# EAGLE board gatedriver_trafo_sma_compact_ACDC_ultra (EAGLE 7.2.0)
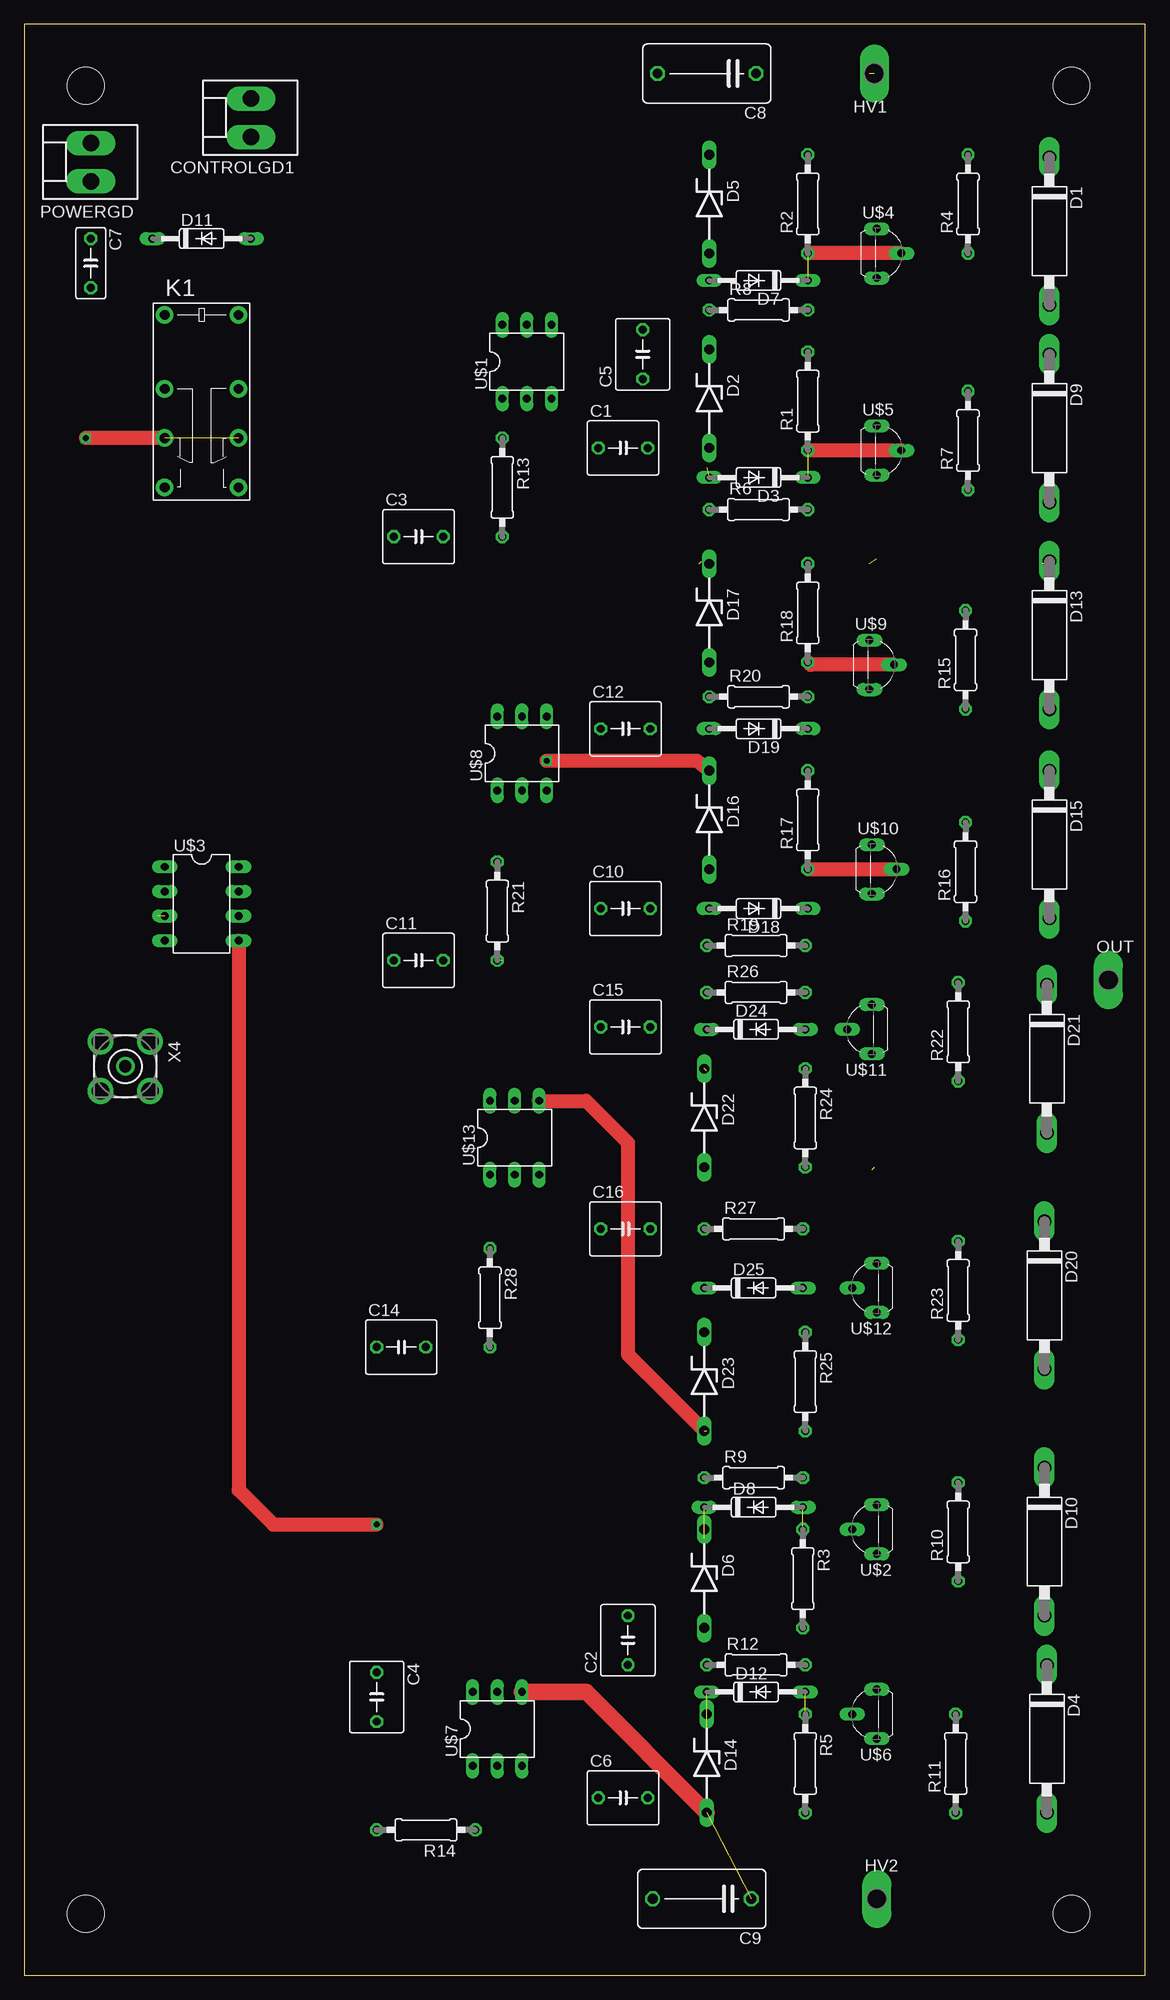
[diagram p0: board, top side]
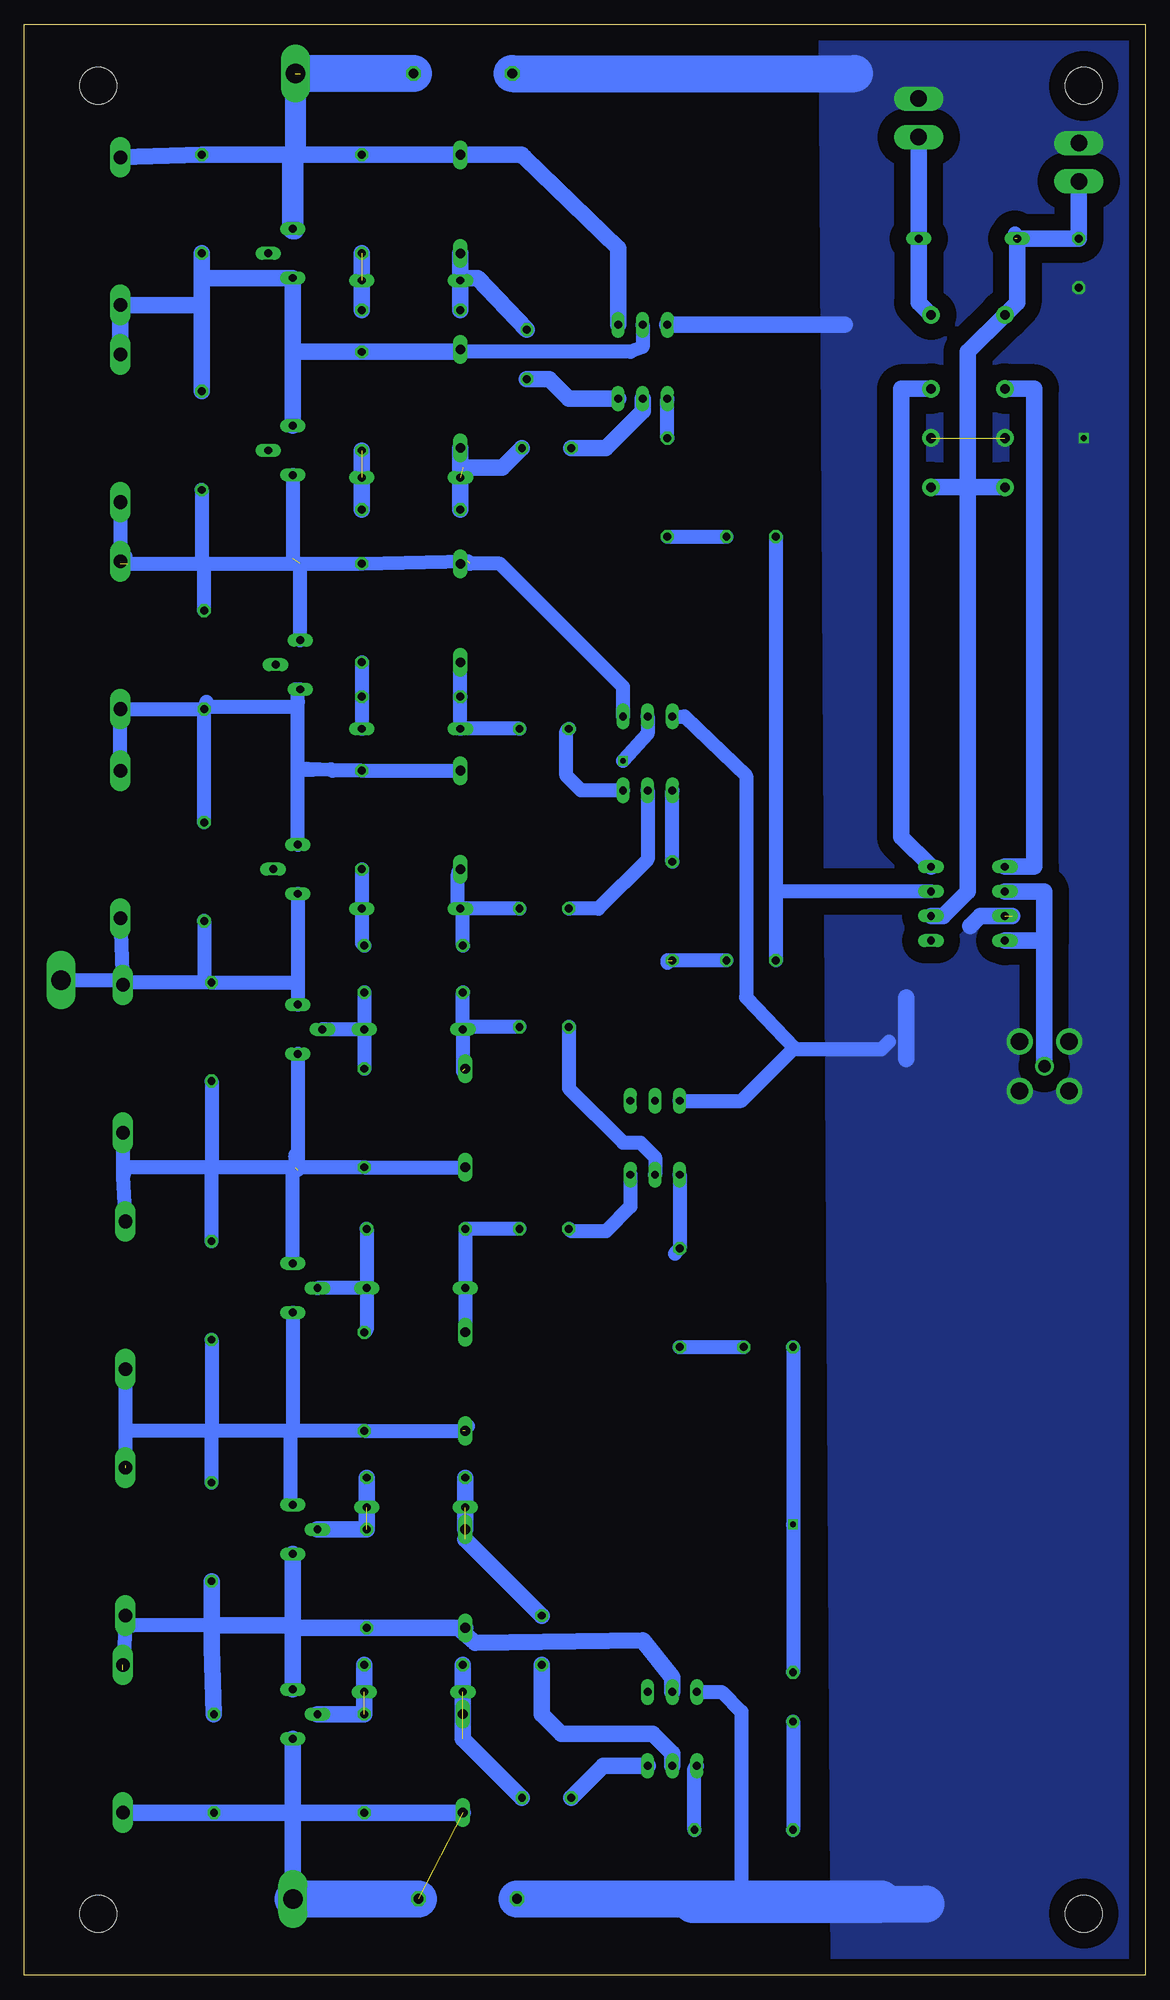
[diagram p1: board, bottom side, seen from below]

Size 115.57 x 201.17 mm. Coordinates in mm from the lower left corner, seen from the top.
Outline: 0,0 115.57,0 115.57,201.17 0,201.17 0,0
Copper layers (1*16): Top 0.035mm / dielectric 1.5mm / Bottom 0.035mm
Design rules "default": minimum track width 10mil, minimum drill 24mil, track to track 8mil, track to pad 8mil, pad to pad 8mil, via to via 8mil, smd to smd 8mil, copper to edge 40mil, drill to drill 8mil, minimum pad ring 10mil, minimum via ring 8mil, stop-mask expansion 4mil, vias tented up to drill 0mil, thermal gap 10mil
Holes 3.8 mm at 107.95,194.82 107.95,6.35 6.35,6.35 6.35,194.82

## Footprints (pad centres in the part's own frame; a part is rotated, then mirrored left to right if it is on the bottom)
C050-055X075 = drill 0.813 octagon: 1 -2.54,0; 2 2.54,0
C050-030X075 = drill 0.813 octagon: 1 -2.54,0; 2 2.54,0
C102-064X133 = drill 1.016 octagon: 1 -5.08,0; 2 5.08,0
KK-156-2 = drill 1.7 pad 2.184 long: 1 -1.98,0; 2 1.98,0
C1702-15 = drill 1.397 long: A 7.62,0; C -7.62,0
ZDIO-10 = drill 1 long: A 5.08,0; C -5.08,0
DO35-10 = drill 0.813 long: A 5.08,0; C -5.08,0
P1-20Y = drill 2.007 pad 2.54 long: TP 0,0
G5V-2 = drill 1 pad 1.8: 1 -8.89,-3.81; 4 -1.27,-3.81; 6 3.81,-3.81; 8 8.89,-3.81; 9 8.89,3.81; 11 3.81,3.81; 13 -1.27,3.81; 16 -8.89,3.81
0207/10 = drill 0.813 octagon: 1 -5.08,0; 2 5.08,0
DIL06 = drill 0.813 long: 1 -2.54,-3.81; 2 0,-3.81; 3 2.54,-3.81; 4 2.54,3.81; 5 0,3.81; 6 -2.54,3.81
TO92L = drill 0.813 long: 1 0,-2.54; 2 2.54,0; 3 0,2.54
DIL08 = drill 0.813 long: 1 -3.81,-3.81; 2 -1.27,-3.81; 3 1.27,-3.81; 4 3.81,-3.81; 5 3.81,3.81; 6 1.27,3.81; 7 -1.27,3.81; 8 -3.81,3.81
BU-SMA-V = drill 1.27: 1 0,0 | drill 1.778: 2 -2.55,2.55; 3 2.55,2.55; 4 2.55,-2.55; 5 -2.55,-2.55

## Placement (x,y rotation side)
C1  .22u  [C050-055X075]  61.72,157.48 0 top
C2  .22u  [C050-055X075]  62.23,34.54 90 top
C3  .22u  [C050-055X075]  40.64,148.34 0 top
C4  .22u  [C050-055X075]  36.32,28.7 270 top
C5  .22u  [C050-055X075]  63.75,167.13 90 top
C6  .22u  [C050-055X075]  61.72,18.29 0 top
C7  [C050-030X075]  6.86,176.53 270 top
C8  10p  [C102-064X133]  70.36,196.09 180 top
C9  10p  [C102-064X133]  69.85,7.87 180 top
C10  .22u  [C050-055X075]  61.98,109.98 0 top
C11  .22u  [C050-055X075]  40.64,104.65 0 top
C12  .22u  [C050-055X075]  61.98,128.52 0 top
C14  .22u  [C050-055X075]  38.86,64.77 0 top
C15  .22u  [C050-055X075]  61.98,97.79 0 top
C16  .22u  [C050-055X075]  61.98,76.96 0 top
CONTROLGD1  [KK-156-2]  23.37,191.52 90 top
D1  P6KEXXA  [C1702-15]  105.66,179.83 270 top
D2  4742  [ZDIO-10]  70.61,162.56 270 top
D3  1N4148DO35-10  [DO35-10]  75.69,154.43 180 top
D4  P6KEXXA  [C1702-15]  105.41,24.38 270 top
D5  4742  [ZDIO-10]  70.61,182.63 270 top
D6  4742  [ZDIO-10]  70.1,40.89 270 top
D7  1N4148DO35-10  [DO35-10]  75.69,174.75 180 top
D8  1N4148DO35-10  [DO35-10]  75.18,48.26 0 top
D9  P6KEXXA  [C1702-15]  105.66,159.51 270 top
D10  P6KEXXA  [C1702-15]  105.16,44.7 270 top
D11  1N4148DO35-10  [DO35-10]  18.29,179.07 0 top
D12  1N4148DO35-10  [DO35-10]  75.44,29.21 0 top
D13  P6KEXXA  [C1702-15]  105.66,138.18 270 top
D14  4742  [ZDIO-10]  70.36,21.84 270 top
D15  P6KEXXA  [C1702-15]  105.66,116.59 270 top
D16  4742  [ZDIO-10]  70.61,119.13 270 top
D17  4742  [ZDIO-10]  70.61,140.46 270 top
D18  1N4148DO35-10  [DO35-10]  75.69,109.98 180 top
D19  1N4148DO35-10  [DO35-10]  75.69,128.52 180 top
D20  P6KEXXA  [C1702-15]  105.16,70.1 270 top
D21  P6KEXXA  [C1702-15]  105.41,94.49 270 top
D22  4742  [ZDIO-10]  70.1,88.39 270 top
D23  4742  [ZDIO-10]  70.1,61.21 270 top
D24  1N4148DO35-10  [DO35-10]  75.44,97.54 0 top
D25  1N4148DO35-10  [DO35-10]  75.18,70.87 0 top
HV1  TPPAD1-20Y  [P1-20Y]  87.63,196.09 180 top
HV2  TPPAD1-20Y  [P1-20Y]  87.88,7.87 0 top
K1  G5V-2  [G5V-2]  18.29,162.31 270 top
OUT  TPPAD1-20Y  [P1-20Y]  111.76,102.62 0 top
POWERGD  [KK-156-2]  6.86,186.94 90 top
R1  50k  [0207/10]  80.77,162.31 90 top
R2  50k  [0207/10]  80.77,182.63 90 top
R3  50k  [0207/10]  80.26,40.89 270 top
R4  1M  [0207/10]  97.28,182.63 90 top
R5  50k  [0207/10]  80.52,21.84 270 top
R6  70  [0207/10]  75.69,151.13 0 top
R7  1M  [0207/10]  97.28,158.24 90 top
R8  70  [0207/10]  75.69,171.7 0 top
R9  70  [0207/10]  75.18,51.31 0 top
R10  1M  [0207/10]  96.27,45.72 90 top
R11  1M  [0207/10]  96.01,21.84 90 top
R12  70  [0207/10]  75.44,32 0 top
R13  70  [0207/10]  49.28,153.42 270 top
R14  70  [0207/10]  41.4,14.99 180 top
R15  1M  [0207/10]  97.03,135.64 90 top
R16  1M  [0207/10]  97.03,113.79 90 top
R17  50k  [0207/10]  80.77,119.13 90 top
R18  50k  [0207/10]  80.77,140.46 90 top
R19  70  [0207/10]  75.44,106.17 0 top
R20  70  [0207/10]  75.69,131.83 0 top
R21  70  [0207/10]  48.77,109.73 270 top
R22  1M  [0207/10]  96.27,97.28 90 top
R23  1M  [0207/10]  96.27,70.61 90 top
R24  50k  [0207/10]  80.52,88.39 270 top
R25  50k  [0207/10]  80.52,61.21 270 top
R26  70  [0207/10]  75.44,101.35 0 top
R27  70  [0207/10]  75.18,76.96 0 top
R28  70  [0207/10]  48.01,69.85 270 top
U$1  DA-2320  [DIL06]  51.82,166.37 0 top
U$2  VN0550L  [TO92L]  87.88,45.97 180 top
U$3  UCC27425  [DIL08]  18.29,110.49 270 top
U$4  VP0550L  [TO92L]  87.88,177.55 0 top
U$5  VP0550L  [TO92L]  87.88,157.23 0 top
U$6  VN0550L  [TO92L]  87.88,26.92 180 top
U$7  DA-2320  [DIL06]  48.77,25.4 0 top
U$8  DA-2320  [DIL06]  51.31,125.98 0 top
U$9  VP0550L  [TO92L]  87.12,135.13 0 top
U$10  VP0550L  [TO92L]  87.38,114.05 0 top
U$11  VN0550L  [TO92L]  87.38,97.54 180 top
U$12  VN0550L  [TO92L]  87.88,70.87 180 top
U$13  DA-2320  [DIL06]  50.55,86.36 0 top
X4  BU-SMA-V  [BU-SMA-V]  10.41,93.73 270 top

## Library data of the parts
C1-C6 C8-C12 C14-C16 = resistor
C7 R1-R28 = rcl
CONTROLGD1 POWERGD = con-molex; OC_FARNELL: unknown; OC_NEWARK: unknown
D1-D25 = diode
HV1 HV2 OUT = testpad
K1 = relay; MPN: G5V-2 5DC; OC_FARNELL: 9949488; OC_NEWARK: 78K5703
U$1 U$7 U$8 U$13 = trafo
U$2 U$4-U$6 U$9-U$12 = transistor-fet
U$3 = texas
X4 = con-coax; OC_FARNELL: unknown; OC_NEWARK: unknown

## Nets
+15V: C7.1 D11.C K1.1 K1.8 K1.9 POWERGD.1 U$3.6
ENSW: CONTROLGD1.1 D11.A K1.16
GND: C7.2 C8.2 C9.2 CONTROLGD1.2 K1.6 K1.11 POWERGD.2 U$1.6 U$3.3 U$7.6 U$8.6 U$13.6 X4.2 X4.3 X4.4 X4.5
N$1: U$3.2 U$3.4 X4.1
N$2: C3.1 C11.1 U$3.7
N$3: R13.1 U$1.1
N$4: C4.1 C14.1 U$3.5
N$5: C1.1 U$1.2
N$6: R14.1 U$7.1
N$7: C5.1 U$1.3
N$8: D3.C R1.1 R6.2 U$5.2
N$9: U$7.5
N$10: C1.2 D2.A D3.A R6.1
N$11: D12.A R5.1 R12.2 U$6.2
N$12: D7.C R2.1 R8.2 U$4.2
N$13: D4.C D6.A D10.A R3.2 R10.1 R11.2 U$2.3 U$6.1
N$14: K1.4 U$3.1
N$15: K1.13 U$3.8
N$16: C5.2 D5.A D7.A R8.1
N$17: C8.1 D1.C D5.C HV1.TP R2.2 R4.2 U$1.4 U$4.3
N$18: D1.A D2.C D9.C R1.2 R4.1 R7.2 U$1.5 U$4.1 U$5.3
N$19: C3.2 R13.2
N$20: C4.2 R14.2
N$22: C2.1 U$7.2
N$23: C6.1 U$7.3
N$24: C9.1 D4.A D14.A HV2.TP R5.2 R11.1 U$6.3 U$7.4
N$25: C2.2 D6.C D8.C R9.1
N$26: D15.A D21.C OUT.TP R16.1 R22.2 U$10.1 U$11.1
N$27: C6.2 D12.C D14.C R12.1
N$28: C10.1 U$8.2
N$29: C12.1 U$8.3
N$30: C12.2 D17.A D19.A R20.1
N$32: D9.A D13.C D17.C R7.1 R15.2 R18.2 U$5.1 U$8.4 U$9.3
N$33: D13.A D15.C D16.C R15.1 R16.2 R17.2 U$8.5 U$9.1 U$10.3
N$34: D18.C R17.1 R19.2 U$10.2
N$35: C10.2 D16.A D18.A R19.1
N$36: D19.C R18.1 R20.2 U$9.2
N$37: R21.1 U$8.1
N$38: C11.2 R21.2
N$40: C15.1 U$13.2
N$41: C16.1 U$13.3
N$42: C15.2 D22.C D24.C R26.1
N$43: C16.2 D23.C D25.C R27.1
N$45: U$13.5
N$46: D20.C D21.A D22.A R22.1 R23.2 R24.2 U$11.3 U$12.1
N$47: D25.A R25.1 R27.2 U$12.2
N$48: R28.1 U$13.1
N$49: C14.2 R28.2
N$50: D24.A R24.1 R26.2 U$11.2
N$51: D10.C D20.A D23.A R10.2 R23.1 R25.2 U$2.1 U$12.3 U$13.4
N$251: D8.A R3.1 R9.2 U$2.2

## Tracks (layer width: path | path; a pad name or v marks a point on that pad's centre or on a via)
+15V  (1 unrouted)
  Bottom 1.422: 13.46,179.07 13.46,179.58
  Bottom 1.676: D11.C 13.21,172.47 K1.1 18.29,167.39 18.29,153.42 | 18.29,153.42 18.29,111.76 20.83,109.22 U$3.6 | 18.29,153.42 K1.9 | K1.8 18.29,153.42 | POWERGD.1 C7.1 13.46,179.07
ENSW
  Bottom 1.676: CONTROLGD1.1 D11.A 23.37,172.47 K1.16
GND  (via drill 0.6)  (2 unrouted)
  Top 1.422: K1.6 v6.35,158.5
  Bottom 1.422: U$7.6 43.69,29.21 41.66,27.18 41.66,8.13 41.91,7.87 | U$8.6 47.5,129.79 41.15,123.7 41.15,100.84 36.19,95.63 | 36.19,95.63 36.07,95.5 27.18,95.5 26.42,96.27 | U$13.6 41.65,90.17 36.19,95.63
  Bottom 1.676: 30.99,170.18 U$1.6 | 24.64,100.84 24.64,94.49 | 18.03,108.2 17.02,109.22 13.72,109.22
  Bottom 3.81: 46.69,7.31 27.18,7.34 | 27.18,7.34 22.61,7.37 | C8.2 29.97,196.09 | C9.2 41.91,7.87 27.18,7.87 27.18,7.34
  pour Bottom (isolate 1.676, no thermals): 0.25,200.91 33.53,201.17 32.26,0.25 0.25,0
N$1
  Bottom 1.676: X4.1 10.41,106.68 | U$3.2 10.41,111.76 10.41,106.68 | 10.41,106.68 U$3.4
N$2
  Bottom 1.422: C3.1 38.1,111.76 | 38.1,111.76 C11.1 | U$3.7 38.1,111.76
N$3
  Bottom 1.422: R13.1 U$1.1
N$4  (via drill 0.6)
  Top 1.422: U$3.5 22.1,50.04 25.65,46.48 v36.32,46.48
  Bottom 1.422: C14.1 v36.32,46.48 C4.1
N$5
  Bottom 1.676: U$1.2 51.82,161.29 55.63,157.48 C1.1
N$6
  Bottom 1.422: R14.1 46.48,21.34 U$7.1
N$7
  Bottom 1.676: U$1.3 59.44,162.56 61.47,164.59 C5.1
N$8  (1 unrouted)
  Top 1.422: U$5.2 R1.1
  Bottom 1.676: R6.2 R1.1
N$9
  Bottom 1.676: U$7.5 48.77,30.73 51.82,34.54 69.09,34.29 70.87,35.81 73.66,35.81
N$10  (1 unrouted)
  Bottom 1.676: C1.2 66.29,155.45 70.36,155.45 70.61,155.7 | 70.61,155.7 D2.A | R6.1 70.61,155.7
N$11  (1 unrouted)
  Bottom 1.676: R12.2 R5.1 U$6.2
N$12  (1 unrouted)
  Top 1.422: U$4.2 R2.1
  Bottom 1.676: R8.2 R2.1
N$13  (1 unrouted)
  Bottom 1.422: D10.A 105.16,35.81 | 105.16,35.81 105.41,31.5 | 96.27,36.07 104.39,36.07 105.16,35.81
  Bottom 1.676: U$2.3 87.88,35.81 | R10.1 96.27,36.07 | 96.27,36.07 96.27,33.78 R11.2 | D6.A R3.2 87.88,35.81 | U$6.1 87.88,35.81 | 87.88,35.81 87.63,36.07 96.27,36.07
N$14
  Bottom 1.676: 13.97,114.3 U$3.1 11.43,114.3 11.43,163.58 K1.4
N$15
  Bottom 1.676: K1.13 25.15,163.58 25.15,117.35 U$3.8
N$16
  Bottom 1.676: C5.2 68.83,175.01 70.36,175.01 D7.A | D7.A R8.1 | D5.A D7.A
N$17  (1 unrouted)
  Bottom 1.676: 87.63,187.71 87.63,179.83 U$4.3 | 87.63,187.71 87.9,187.7 87.65,187.45 87.63,187.71 | 87.63,187.71 R4.2 D1.C | U$1.4 54.36,178.05 64.01,187.45 64.26,187.71 D5.C R2.2 87.63,187.71
  Bottom 2.184: U$4.3 87.9,187.7 | HV1.TP 87.63,187.71
  Bottom 3.81: C8.1 87.12,196.09
N$18
  Bottom 1.422: U$1.5 51.82,167.89 53.09,167.39 R1.2
  Bottom 1.676: 87.88,167.39 U$4.1 97.28,175.01 | 87.88,167.39 U$5.3 | D9.C D1.A 97.28,172.21 | 97.28,172.21 97.28,175.01 | 97.28,172.21 R7.2 | R4.1 97.28,175.01 | D2.C 70.87,167.39 R1.2 87.88,167.39
N$19
  Bottom 1.422: R13.2 C3.2
N$20
  Bottom 1.422: C4.2 R14.2
N$22
  Bottom 1.676: U$7.2 48.77,22.86 50.8,24.89 60.2,24.89 62.23,26.92 C2.1
N$23
  Bottom 1.676: U$7.3 55.88,21.59 C6.1
N$24  (1 unrouted)
  Top 1.676: U$7.4 57.91,29.21 D14.A
  Bottom 1.676: D4.A R11.1 R5.2 D14.A | 87.88,7.62 HV2.TP U$6.3
  Bottom 3.81: HV2.TP C9.1
N$25  (2 unrouted)
  Bottom 1.676: C2.2 70.1,44.96 | D6.C R9.1
N$26
  Bottom 1.422: D15.A D21.C | R16.1 97.03,102.62 R22.2 | R22.2 87.63,102.36 87.38,102.62 | R22.2 104.9,102.36 D21.C | OUT.TP 105.16,102.62 D21.C | U$10.1 87.38,102.62 | 87.38,102.62 U$11.1
N$27  (2 unrouted)
  Bottom 1.676: C6.2 70.36,24.38 R12.1
N$28
  Bottom 1.422: U$8.2 51.31,115.06 56.39,109.98 C10.1
N$29
  Bottom 1.422: U$8.3 58.17,122.17 59.69,123.7 59.69,128.27 C12.1
N$30
  Bottom 1.422: D17.A R20.1 D19.A C12.2
N$32  (3 unrouted)
  Bottom 1.422: 104.9,145.54 97.28,145.54 | 97.28,145.54 97.03,145.54 | 97.03,145.54 87.12,145.54 | 87.12,145.54 R18.2 69.85,145.8 D17.C | U$8.4 53.85,132.84 66.55,145.54 69.6,145.54 | D9.A 105.66,145.54 105.16,146.3 D13.C | U$5.1 87.88,146.05 | R7.1 97.28,145.54 | U$9.3 87.12,145.54 | R15.2 97.03,145.54
N$33  (via drill 0.6)
  Top 1.422: v53.85,125.22 69.34,125.22 D16.C
  Bottom 1.422: U$8.5 51.31,128.02 v53.85,125.22 | 83.95,124.33 83.82,124.21 R17.2 D16.C | 83.95,124.33 87.38,124.21 | 87.38,124.46 83.95,124.33 | D15.C D13.A R15.1 | R15.1 96.77,131.32 97.03,130.81 | 97.03,130.81 87.63,130.81 87.38,131.32 | 87.38,131.32 87.38,132.33 | 87.38,132.33 87.63,132.59 | U$10.3 87.38,124.21 | 87.38,124.21 87.38,124.46 | 87.38,124.46 87.38,131.32 | 87.38,132.33 U$9.1 | R16.2 R15.1 | 97.03,130.81 R15.1
N$34
  Top 1.422: R17.1 U$10.2
  Bottom 1.422: R17.1 D18.C 80.77,106.43 R19.2
N$35
  Bottom 1.422: C10.2 D18.A | D18.A 70.87,109.98 70.87,113.54 D16.A | R19.1 70.36,109.73 D18.A
N$36
  Top 1.422: U$9.2 81.03,135.13 R18.1
  Bottom 1.422: R18.1 R20.2 D19.C
N$37
  Bottom 1.422: R21.1 U$8.1
N$38  (1 unrouted)
  Bottom 1.422: C11.2 49.28,104.65 49.28,104.39
N$40
  Bottom 1.422: C15.1 59.44,91.44 53.85,85.85 52.07,85.85 50.55,84.33 U$13.2
N$41
  Bottom 1.422: U$13.3 53.09,79.25 55.63,76.71 59.18,76.71 C16.1
N$42  (1 unrouted)
  Bottom 1.422: C15.2 70.1,97.79 D24.C | D24.C R26.1 | D24.C 70.36,93.22 70.1,92.96
N$43
  Bottom 1.422: C16.2 R27.1 D25.C D23.C
N$46  (1 unrouted)
  Bottom 1.422: D22.A R24.2 87.63,83.31 | D21.A 105.41,82.3 | 105.41,82.3 D20.C | 87.63,83.31 96.01,83.31 | 96.01,83.31 105.16,83.31 105.41,82.3 | R22.1 96.27,83.57 | 96.27,83.57 96.01,83.31 | R23.2 96.27,83.57 | U$11.3 87.38,83.06 87.63,84.58 | U$12.1 87.88,83.06 87.63,83.31
N$47
  Bottom 1.422: R27.2 D25.A | D25.A 80.26,66.55 R25.1 | D25.A U$12.2
N$48
  Bottom 1.422: U$13.1 R28.1 48.51,74.42
N$49
  Bottom 1.422: R28.2 C14.2
N$50
  Bottom 1.422: R26.2 D24.A | D24.A R24.1 | D24.A U$11.2
N$51  (2 unrouted)
  Top 1.422: U$13.4 57.91,90.17 62.23,85.85 62.23,64.01 D23.A
  Bottom 1.422: 69.85,56.64 70.36,56.13 R25.2 88.14,56.13 | D20.A 105.16,56.13 | 105.16,56.13 105.16,52.58 104.9,52.58 | 88.14,56.13 96.27,56.13 | 96.27,56.13 105.16,56.13 | U$12.3 87.88,56.9 88.14,56.13 | 88.14,56.13 88.14,48.77 U$2.1 | R23.1 96.27,56.13 | R10.2 96.27,56.13
N$251  (1 unrouted)
  Bottom 1.676: R9.2 R3.1 U$2.2